# Altium PCB STM 32 F4 sensor_motor.PcbDoc
Units mm, origin at the board's own origin, x right, y up, seen from the top; angles counter-clockwise.
Board outline 287.78 x 230 mm, 2 copper layers (Top Layer, Bottom Layer); 23 components, 98 nets, 264 pads, 0 vias.
Unrouted connection lines stored in the file: 120.
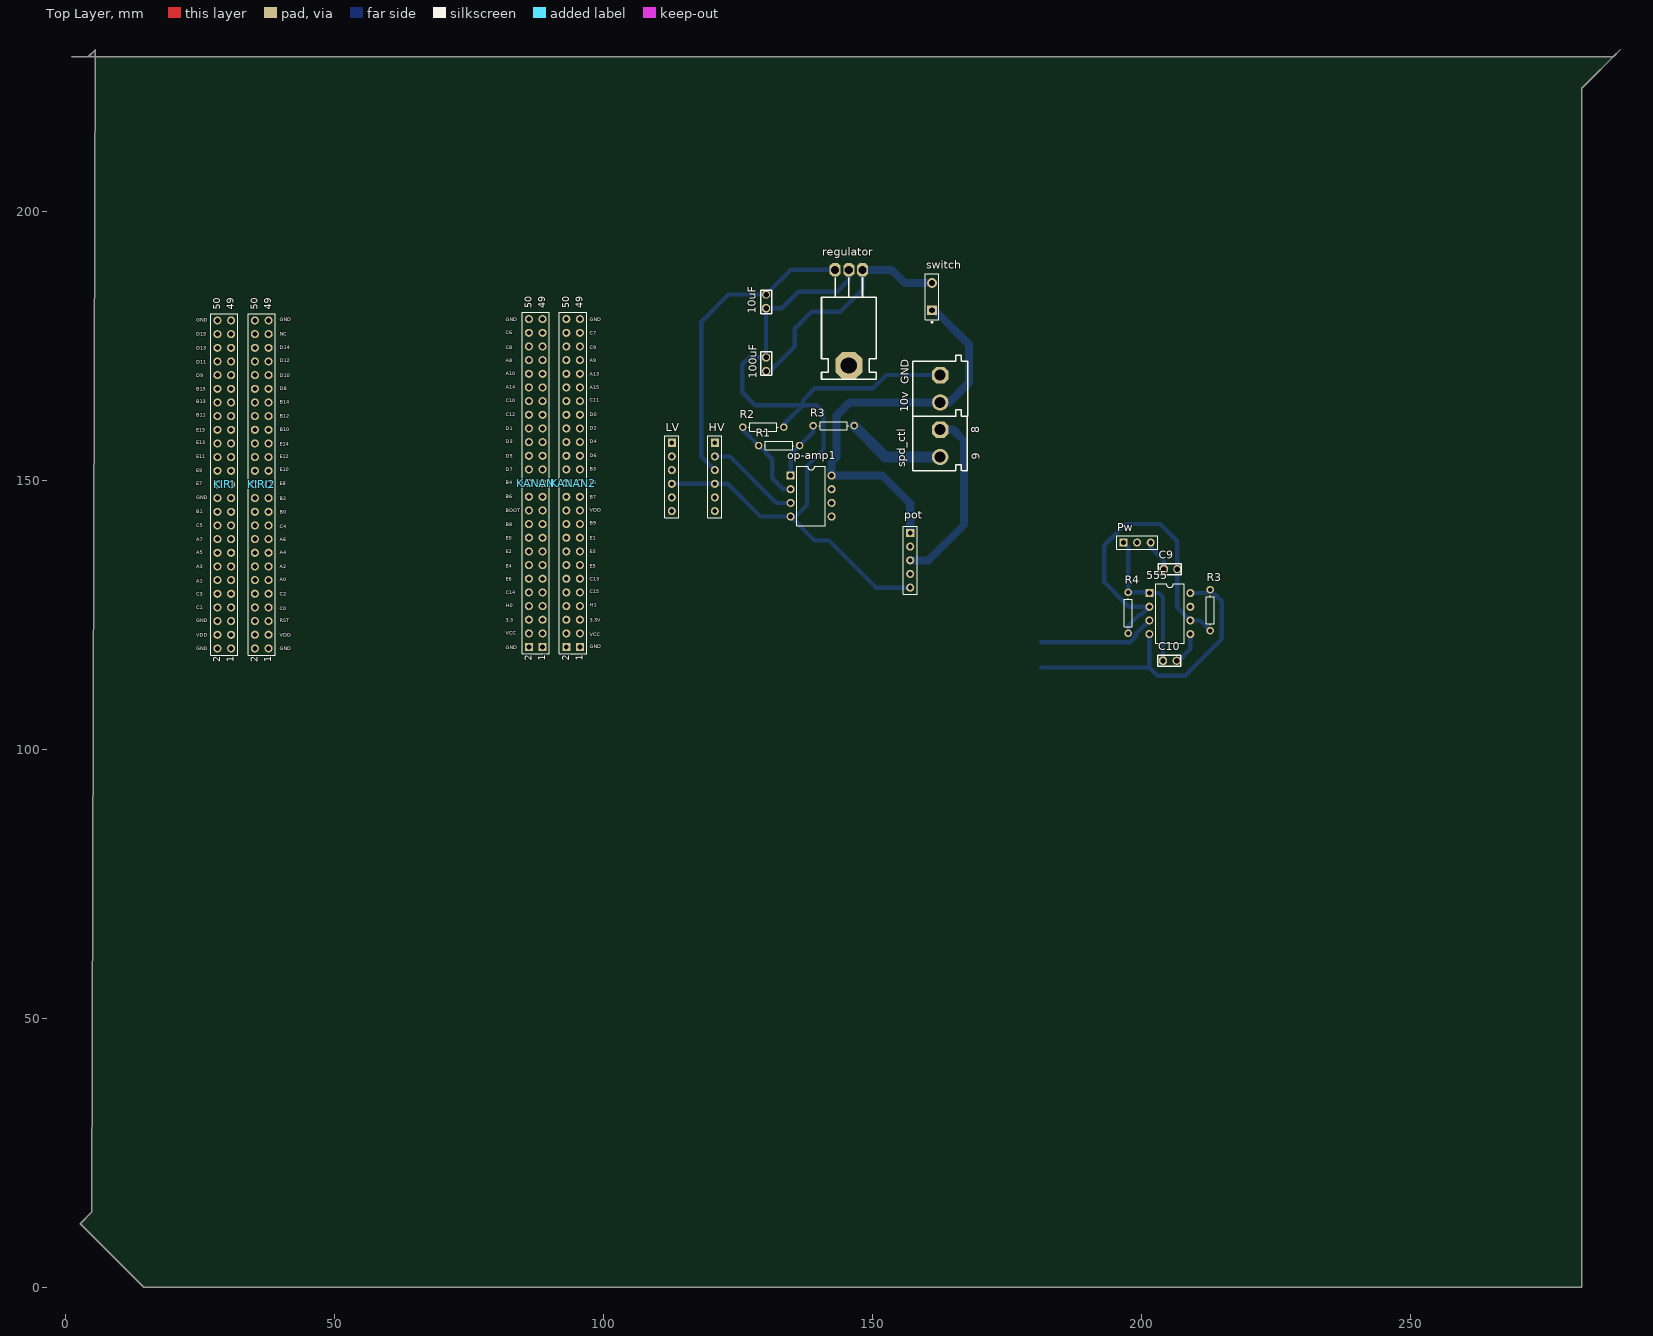
[diagram p0: Top Layer view]
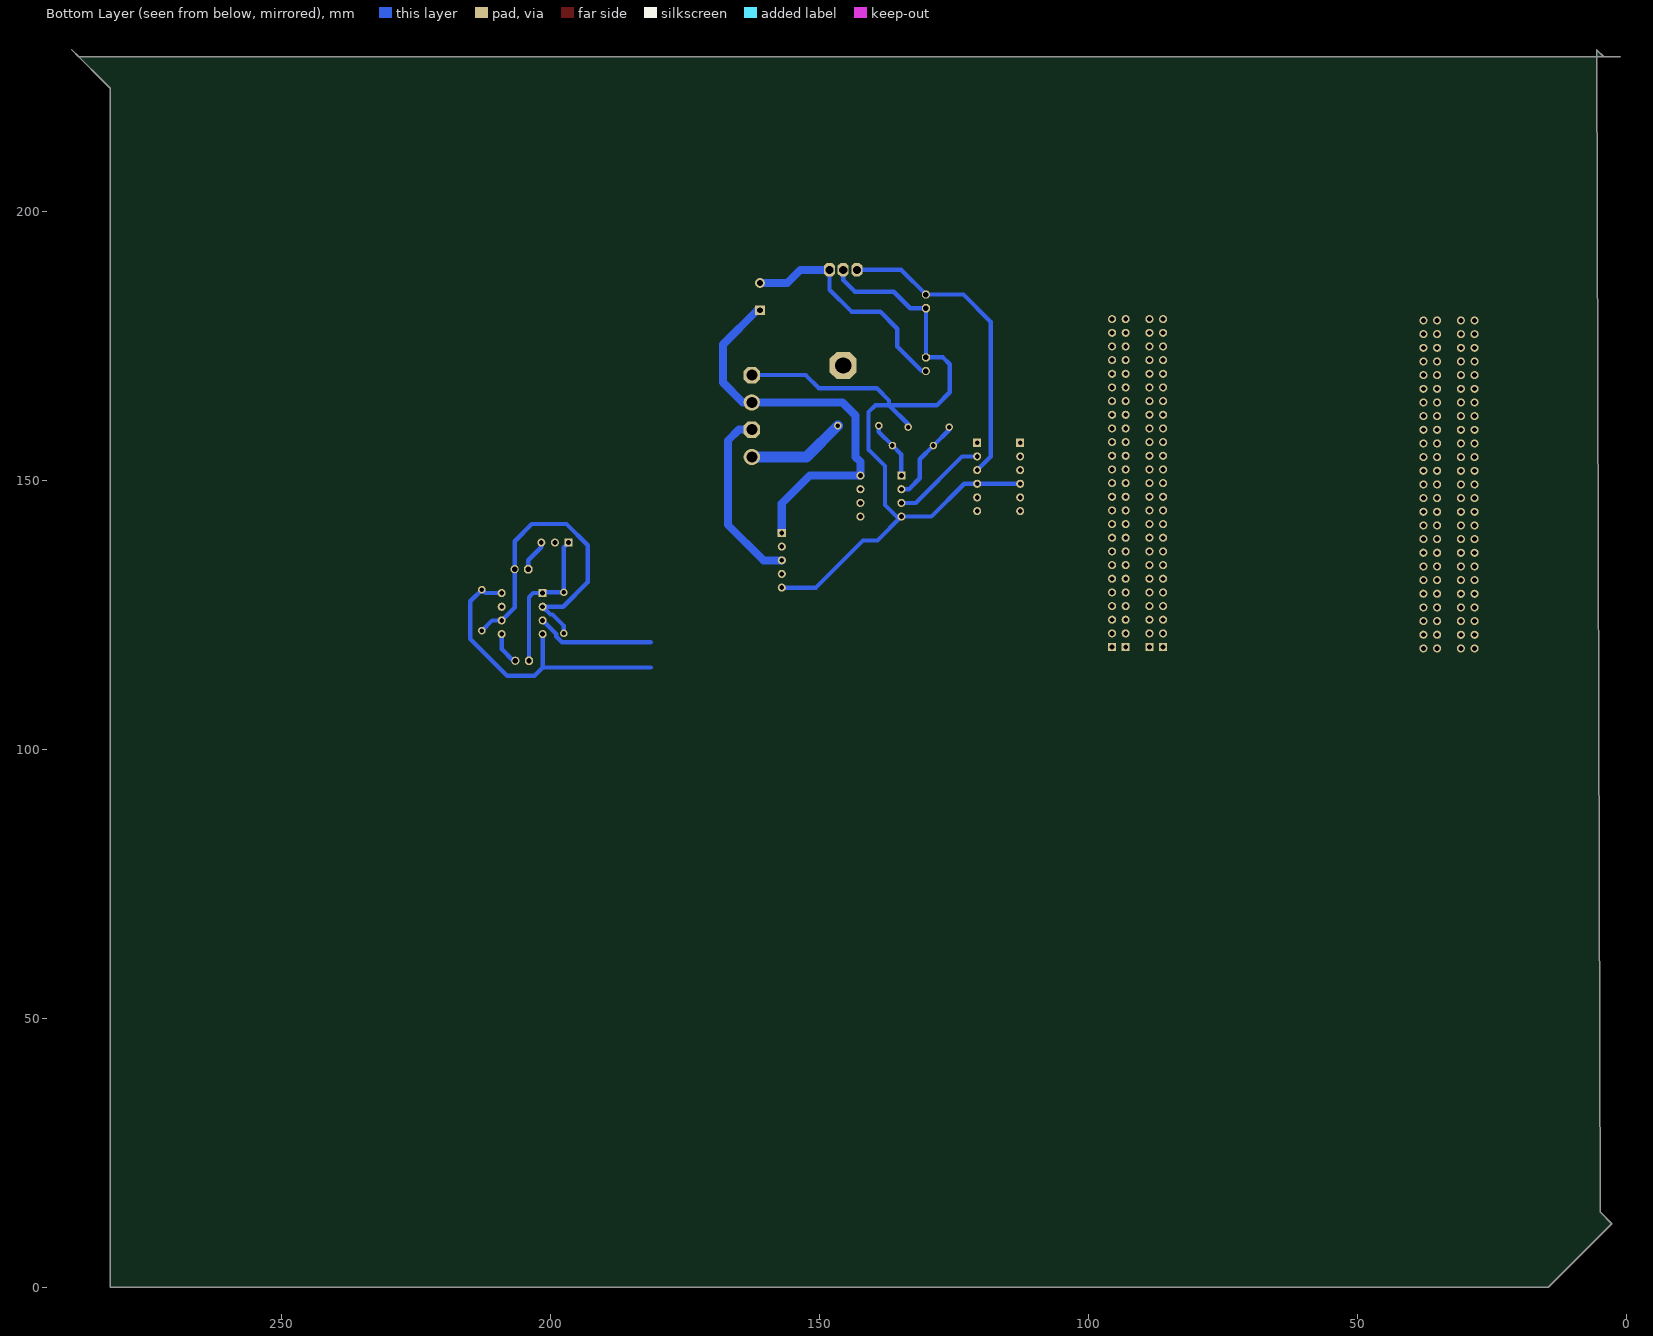
[diagram p1: Bottom Layer view, seen from below]

## Layer stack, top to bottom
Top Solder: solder mask 0.0102, Solder Resist, Dk 3.5
Top Layer: signal copper 0.0356
Dielectric1: dielectric 0.32, FR-4, Dk 4.8
Bottom Layer: signal copper 0.0356
Bottom Solder: solder mask 0.0102, Solder Resist, Dk 3.5

## Board outline
5.461,229.997 4.191,228.727 1.143,228.727 287.655,228.727 288.925,229.997 281.813,222.885 281.813,0 14.478,0 2.667,11.811 4.826,13.97 4.826,14.351

## Design rules (kind name [scope] priority, off if disabled: settings)
Clearance [All] p1: gap=0.3
PolygonConnect [All] p1: connectstyle=Relief reliefconductorwidth=0.254 reliefentries=4 polygonreliefangle="90 Angle" airgapwidth=0.254
RoutingVias [All] p1: holewidth=0.711 width=1.27 viastyle="Through Hole" minholewidth=0.711 minwidth=1.27 maxholewidth=0.711 maxwidth=1.27
SilkToSolderMaskClearance SilkscreenOverComponentPads [IsPad] p1: minsilkscreentomaskgap=0.254 clearancetoexposedcopper=TRUE
SolderMaskExpansion [All] p1: expansion=0.102
Width [All] p1: maxlimit=2 minlimit=0.8 preferedwidth=1 minimp=50.000000 maximp=50.000000 favimp=50.000000
28 further rules are at their usual default settings.

## Components (designator, comment, footprint, x,y, rotation, side; value= is the part's Value field where it differs from the comment)
10uF "Cap" My_cap100n 130.175,183.261 r90 top
10v "CON2 pin blue" My_CN2 167.64,172.085 r270 top
100uF "Cap" My_cap100n 130.175,171.577 r270 top
555 "NE555P" P008 205.232,125.222 r270 top
C9 "Cap" My_cap100n 205.359,133.477 r0 top
C10 "Cap" My_cap100n 205.232,116.459 r0 top
HV "Header 6" HDR1X6 120.65,156.972 r270 top
KANAN "KANAN" HDR2X25#1 88.629,118.999 r90 top
KANAN2 "KANAN 2" HDR2X25#1 95.584,118.999 r90 top
KIRI "KIRI" HDR2X25#2 30.734,118.745 r90 top locked
KIRI2 "KIRI 2" HDR2X25#2 37.689,118.75 r90 top
LV "Header 6" HDR1X6 112.649,156.972 r270 top
op-amp1 "LM358P" P008 138.557,147.066 r270 top
pot "Header 5" HDR1X5 156.972,140.208 r270 top
Pw "Header 3" HDR1X3 196.596,138.43 r0 top
R1 "Res1" AXIAL-0.3 132.588,156.464 r0 top
R2 "Res1" AXIAL-0.3 129.667,159.893 r180 top
R3 "Res1" AXIAL-0.3 142.748,160.147 r0 top
R3 "Res1" AXIAL-0.3 212.725,125.857 r90 top
R4 "Res1" AXIAL-0.3 197.485,125.349 r270 top
regulator "7805" My_TO-220 148.082,189.103 r180 top
spd_ctl "CON2 pin blue" My_CN2 167.627,161.938 r270 top
switch "SW-SPST" SPST-2 161.036,184.15 r90 top

## Footprints (in the part's own frame and the unit in brackets; to place one, negate y for a bottom-side part, rotate by r counter-clockwise, add the part's x,y. Pads: shape width x height; smd on the part's side, far side on the other; paste and mask are expansions set on the pad)
AXIAL-0.3 [mm] "Axial Device, Thru-Hole; 2 Leads; 0.3 in Pin Spacing"
  round 1.4 hole 0.85: 1(-3.81,0) 2(3.81,0)
  silkscreen extent -2.77,-0.76 2.77,0.76
HDR1X3 [mm] "Connector; Header; 3 Position"
  rect 1.5x1.5 hole 0.9: 1(0,0)
  round 1.5 hole 0.9: 2(2.54,0) 3(5.08,0)
  silkscreen extent -1.27,-1.27 6.35,1.27
HDR1X5 [mm] "Connector; Header; 5 Position"
  rect 1.5x1.5 hole 0.9: 1(0,0)
  round 1.5 hole 0.9: 2(2.54,0) 3(5.08,0) 4(7.62,0) 5(10.16,0)
  silkscreen extent -1.27,-1.27 11.43,1.27
HDR1X6 [mm] "Connector; Header; 6 Position"
  rect 1.5x1.5 hole 0.9: 1(0,0)
  round 1.5 hole 0.9: 2(2.54,0) 3(5.08,0) 4(7.62,0) 5(10.16,0) 6(12.7,0)
  silkscreen extent -1.27,-1.27 13.97,1.27
HDR2X25#1 [mm] "Connector; Header; 25x2 Position"
  rect 1.5x1.5 hole 0.9: 1(0,0) 2(0,2.54)
  round 1.5 hole 0.9: 3(2.54,0) 4(2.54,2.54) 5(5.08,0) 6(5.08,2.54) 7(7.62,0) 8(7.62,2.54) 9(10.16,0) 10(10.16,2.54) 11(12.7,0) 12(12.7,2.54) 13(15.24,0) 14(15.24,2.54) 15(17.78,0) 16(17.78,2.54) 17(20.32,0) 18(20.32,2.54) 19(22.86,0) 20(22.86,2.54) 21(25.4,0) 22(25.4,2.54) 23(27.94,0) 24(27.94,2.54) 25(30.48,0) 26(30.48,2.54) 27(33.02,0) 28(33.02,2.54) 29(35.56,0) 30(35.56,2.54) 31(38.1,0) 32(38.1,2.54) 33(40.64,0) 34(40.64,2.54) 35(43.18,0) 36(43.18,2.54) 37(45.72,0) 38(45.72,2.54) 39(48.26,0) 40(48.26,2.54) 41(50.8,0) 42(50.8,2.54) 43(53.34,0) 44(53.34,2.54) 45(55.88,0) 46(55.88,2.54) 47(58.42,0) 48(58.42,2.54) 49(60.96,0) 50(60.96,2.54)
  silkscreen extent -1.27,-1.27 62.23,3.81
HDR2X25#2 [mm] "Connector; Header; 25x2 Position"
  round 1.5 hole 0.9: 1(0,0) 2(0,2.54) 3(2.54,0) 4(2.54,2.54) 5(5.08,0) 6(5.08,2.54) 7(7.62,0) 8(7.62,2.54) 9(10.16,0) 10(10.16,2.54) 11(12.7,0) 12(12.7,2.54) 13(15.24,0) 14(15.24,2.54) 15(17.78,0) 16(17.78,2.54) 17(20.32,0) 18(20.32,2.54) 19(22.86,0) 20(22.86,2.54) 21(25.4,0) 22(25.4,2.54) 23(27.94,0) 24(27.94,2.54) 25(30.48,0) 26(30.48,2.54) 27(33.02,0) 28(33.02,2.54) 29(35.56,0) 30(35.56,2.54) 31(38.1,0) 32(38.1,2.54) 33(40.64,0) 34(40.64,2.54) 35(43.18,0) 36(43.18,2.54) 37(45.72,0) 38(45.72,2.54) 39(48.26,0) 40(48.26,2.54) 41(50.8,0) 42(50.8,2.54) 43(53.34,0) 44(53.34,2.54) 45(55.88,0) 46(55.88,2.54) 47(58.42,0) 48(58.42,2.54) 49(60.96,0) 50(60.96,2.54)
  silkscreen extent -1.27,-1.27 62.23,3.81
My_cap100n [mil]
  oct 60x60 hole 40: 1(-50,0)
  round 60 hole 40: 2(50,0)
  silkscreen extent -90,-40 80,40
My_CN2 [mil]
  oct 120x120 hole 80: 1(99.5,-200.5)
  round 120 hole 80: 2(299.5,-200.5)
  silkscreen extent -45,-400 400,0
My_TO-220 [mil]
  oct 196.85x196.85 hole 118.11: 0(99.49,699.49)
  oct 80x100 hole 60: 1(-0.5,-0.5) 2(99.5,-0.5) 3(199.5,-0.5)
  silkscreen extent -101,60 300,800
P008 [mm] "DIP; 8 Leads; Row Spacing 7.62 mm; Pitch 2.54 mm"
  rect 1.5x1.5 hole 0.9: 1(-3.81,-3.81)
  round 1.5 hole 0.9: 2(-1.27,-3.81) 3(1.27,-3.81) 4(3.81,-3.81) 5(3.81,3.81) 6(1.27,3.81) 7(-1.27,3.81) 8(-3.81,3.81)
  silkscreen extent -5.5,-2.65 5.5,2.65
SPST-2 [mm] "Switch; 2 Leads"
  rect 1.85x1.85 hole 1.1: 1(-2.54,0)
  round 1.85 hole 1.1: 2(2.54,0)
  silkscreen extent -4.89,-1.27 4.28,1.27

## Part data
10uF 100uF C9 C10: library part "Cap ceramic", "CAP-100Nf"
10v spd_ctl: "Connector blue screw"
555: "Precision Timer"
HV LV: "Header, 6-Pin"
KANAN KANAN2 KIRI KIRI2: library part "Header 25X2", "Header, 25-Pin, Dual row"
op-amp1: "Dual Operational Amplifier"
pot: "Header, 5-Pin"
Pw: "Header, 3-Pin"
R1 R2 R3 R3 R4: "Resistor"
regulator: "Regulator"
switch: "Single-Pole, Single-Throw Switch"

## Nets (pads, with @x,y where several pads share a name; then routed paths per layer and width w, separated by ;. In a path a pad name is that pad's centre, name@x,y a point inside that pad or via, vN(x,y) a via of type N, cw(c..) or ccw(c..) an arc to the next point about the centre after c; other vN are vias at no path point)
GND: 10uF.1 10v.1 100uF.1 555.1 C10.1 HV.4 KANAN2.1 KANAN2.2 KANAN2.49 KANAN2.50 KANAN.1 KANAN.2 KANAN.49 KANAN.50 KIRI2.1 KIRI2.2 KIRI2.6 KIRI2.24 KIRI2.49 KIRI2.50 KIRI.1 KIRI.2 KIRI.6 KIRI.24 KIRI.49 KIRI.50 LV.4 op-amp1.4 pot.5 Pw.1 R2.1 R4.1 regulator.2 | length 192.4
  Bottom Layer w0.8: LV.4 HV.4 123.063,149.352 129.159,143.256 op-amp1.4 ; R2.1 133.477,160.401 137.033,163.957 ; regulator.2 145.555,187.211 143.383,185.039 136.144,185.039 133.096,181.991 10uF.1 100uF.1 127,172.847 125.73,171.577 125.73,166.37 128.143,163.957 137.033,163.957 ; pot.5 150.622,130.048 141.859,138.811 139.192,138.811 op-amp1.4 ; 10v.1 152.54,169.558 150.114,167.132 139.319,167.132 137.033,164.846 137.033,163.957 ; Pw.1 197.485,137.541 R4.1 201.295,129.159 555.1 203.2,129.032 203.962,128.27 C10.1 ; op-amp1.4 135.636,143.256 137.795,145.415 137.795,152.654 140.843,155.702 140.843,162.687 139.573,163.957 137.033,163.957
Net10uF_2: 10uF.2 HV.3 Pw.2 regulator.3 | length 57.5
  Bottom Layer w0.8: HV.3 118.11,154.432 118.11,179.451 123.19,184.531 10uF.2 134.76,189.116 regulator.3
Net10v_2: 10v.2 op-amp1.8 pot.1 switch.1 | length 77.5
  Bottom Layer w1.5: pot.1 156.972,145.669 151.765,150.876 op-amp1.8 142.367,153.448 143.256,154.337 143.256,162.052 145.682,164.478 10v.2 164.224,164.478 167.894,168.148 167.894,175.26 161.544,181.61 switch.1
Net100uF_2: 100uF.2 regulator.1 switch.2 | length 43.7
  Bottom Layer w0.8: 100uF.2 130.937,170.307 135.509,174.879 135.509,178.181 138.684,181.356 144.018,181.356 148.095,185.433 regulator.1
  Bottom Layer w1.5: regulator.1 153.53,189.116 155.956,186.69 switch.2
Net555_2: 555.2 555.6 C9.2 R3.1@212.725,122.047 R4.2 | length 60.7
  Bottom Layer w0.8: R4.2 197.485,122.936 199.591,125.042 199.972,125.042 555.2 197.612,126.492 193.04,131.064 193.04,137.922 196.977,141.859 203.454,141.859 206.629,138.684 C9.2 206.629,126.365 555.6 210.82,123.952 R3.1@212.725,122.047
Net555_3: 555.3 KIRI2.8 KIRI.8 | length 22
  Bottom Layer w0.8: 181.356,119.888 197.814,119.888 198.885,120.959 198.885,121.415 555.3
Net555_5: 555.5 C10.2 | length 6.2
  Bottom Layer w0.8: C10.2 206.883,116.459 209.042,118.618 555.5
NetC9_1: C9.1 Pw.3 | length 6
  Bottom Layer w0.8: Pw.3 201.676,137.541 204.089,135.128 C9.1
NetHV_2: HV.2 op-amp1.3 | length 17.7
  Bottom Layer w0.8: HV.2 123.444,154.432 132.08,145.796 op-amp1.3
NetKANAN2_5: KANAN2.5 KANAN2.6 KANAN.5 KANAN.6 LV.3
NetKANAN2_7: KANAN2.7 KANAN.7
NetKANAN2_8: KANAN2.8 KANAN.8
NetKANAN2_9: KANAN2.9 KANAN.9
NetKANAN2_10: KANAN2.10 KANAN.10
NetKANAN2_11: KANAN2.11 KANAN.11
NetKANAN2_12: KANAN2.12 KANAN.12
NetKANAN2_13: KANAN2.13 KANAN.13
NetKANAN2_14: KANAN2.14 KANAN.14
NetKANAN2_15: KANAN2.15 KANAN.15
NetKANAN2_16: KANAN2.16 KANAN.16
NetKANAN2_17: KANAN2.17 KANAN.17
NetKANAN2_18: KANAN2.18 KANAN.18
NetKANAN2_19: KANAN2.19 KANAN.19
NetKANAN2_20: KANAN2.20 KANAN.20
NetKANAN2_21: KANAN2.21 KANAN.21 KIRI2.3 KIRI2.4 KIRI.3 KIRI.4
NetKANAN2_22: KANAN2.22 KANAN.22
NetKANAN2_23: KANAN2.23 KANAN.23
NetKANAN2_24: KANAN2.24 KANAN.24
NetKANAN2_25: KANAN2.25 KANAN.25
NetKANAN2_26: KANAN2.26 KANAN.26
NetKANAN2_27: KANAN2.27 KANAN.27
NetKANAN2_28: KANAN2.28 KANAN.28
NetKANAN2_29: KANAN2.29 KANAN.29
NetKANAN2_30: KANAN2.30 KANAN.30
NetKANAN2_31: KANAN2.31 KANAN.31
NetKANAN2_32: KANAN2.32 KANAN.32
NetKANAN2_33: KANAN2.33 KANAN.33
NetKANAN2_34: KANAN2.34 KANAN.34
NetKANAN2_35: KANAN2.35 KANAN.35
NetKANAN2_36: KANAN2.36 KANAN.36
NetKANAN2_37: KANAN2.37 KANAN.37
NetKANAN2_38: KANAN2.38 KANAN.38
NetKANAN2_39: KANAN2.39 KANAN.39
NetKANAN2_40: KANAN2.40 KANAN.40
NetKANAN2_41: KANAN2.41 KANAN.41
NetKANAN2_42: KANAN2.42 KANAN.42
NetKANAN2_43: KANAN2.43 KANAN.43
NetKANAN2_44: KANAN2.44 KANAN.44
NetKANAN2_45: KANAN2.45 KANAN.45
NetKANAN2_46: KANAN2.46 KANAN.46
NetKANAN2_47: KANAN2.47 KANAN.47
NetKANAN2_48: KANAN2.48 KANAN.48
NetKIRI2_5: KIRI2.5 KIRI.5
NetKIRI2_7: KIRI2.7 KIRI.7
NetKIRI2_9: KIRI2.9 KIRI.9
NetKIRI2_10: KIRI2.10 KIRI.10
NetKIRI2_11: KIRI2.11 KIRI.11
NetKIRI2_12: KIRI2.12 KIRI.12
NetKIRI2_13: KIRI2.13 KIRI.13
NetKIRI2_14: KIRI2.14 KIRI.14
NetKIRI2_15: KIRI2.15 KIRI.15 LV.2
NetKIRI2_16: KIRI2.16 KIRI.16
NetKIRI2_17: KIRI2.17 KIRI.17
NetKIRI2_18: KIRI2.18 KIRI.18
NetKIRI2_19: KIRI2.19 KIRI.19
NetKIRI2_20: KIRI2.20 KIRI.20
NetKIRI2_21: KIRI2.21 KIRI.21
NetKIRI2_22: KIRI2.22 KIRI.22
NetKIRI2_23: KIRI2.23 KIRI.23
NetKIRI2_25: KIRI2.25 KIRI.25
NetKIRI2_26: KIRI2.26 KIRI.26
NetKIRI2_27: KIRI2.27 KIRI.27
NetKIRI2_28: KIRI2.28 KIRI.28
NetKIRI2_29: KIRI2.29 KIRI.29
NetKIRI2_30: KIRI2.30 KIRI.30
NetKIRI2_31: KIRI2.31 KIRI.31
NetKIRI2_32: KIRI2.32 KIRI.32
NetKIRI2_33: KIRI2.33 KIRI.33
NetKIRI2_34: KIRI2.34 KIRI.34
NetKIRI2_35: KIRI2.35 KIRI.35
NetKIRI2_36: KIRI2.36 KIRI.36
NetKIRI2_37: KIRI2.37 KIRI.37
NetKIRI2_38: KIRI2.38 KIRI.38
NetKIRI2_39: KIRI2.39 KIRI.39
NetKIRI2_40: KIRI2.40 KIRI.40
NetKIRI2_41: KIRI2.41 KIRI.41
NetKIRI2_42: KIRI2.42 KIRI.42
NetKIRI2_43: KIRI2.43 KIRI.43
NetKIRI2_44: KIRI2.44 KIRI.44
NetKIRI2_45: KIRI2.45 KIRI.45
NetKIRI2_46: KIRI2.46 KIRI.46
NetKIRI2_47: KIRI2.47 KIRI.47
NetKIRI2_48: KIRI2.48 KIRI.48
Netop-amp1_1: op-amp1.1 R1.2 R3.1@138.938,160.147 | length 11
  Bottom Layer w0.8: op-amp1.1 134.747,154.813 R1.2 138.938,159.004 R3.1@138.938,160.147
Netop-amp1_2: op-amp1.2 R1.1 R2.2 | length 16.1
  Bottom Layer w0.8: R2.2 125.857,159.385 R1.1 131.318,153.924 131.318,150.368 133.35,148.336 op-amp1.2
Netpot_3: pot.3 spd_ctl.1 | length 33.7
  Bottom Layer w1.5: pot.3 160.401,135.128 167.005,141.732 167.005,157.353 164.948,159.41 spd_ctl.1
NetR3_2: R3.2@146.558,160.147 spd_ctl.2 | length 18.4
  Bottom Layer w2: R3.2@146.558,160.147 152.375,154.33 spd_ctl.2
VCC: 555.4 555.8 KANAN2.3 KANAN2.4 KANAN.3 KANAN.4 R3.2@212.725,129.667 | length 57.2
  Bottom Layer w0.8: 181.356,115.189 201.422,115.189 ; 555.4 201.422,115.189 ; 555.8 212.09,129.032 212.725,129.667 214.884,127.508 214.884,120.523 208.026,113.665 202.946,113.665 201.422,115.189
pads on no net: 555.7 HV.1 HV.5 HV.6 LV.1 LV.5 LV.6 op-amp1.5 op-amp1.6 op-amp1.7 pot.2 pot.4 regulator.0
copper on no net: | length 0.4
  Bottom Layer w0.8: 209.042,126.492 209.289,126.245

## Silkscreen, mask and mechanical layers (free items; w line width, h text height)
Top Overlay:
  text "GND" at 39.751,179.578 h0.7
  text "GND" at 81.788,179.578 h0.7
  text "GND" at 97.409,179.578 h0.7
  text "GND" at 24.257,179.451 h0.7
  text "C6" at 81.788,177.165 h0.7
  text "C7" at 97.409,177.038 h0.7
  text "D15" at 24.257,176.911 h0.7
  text "NC" at 39.751,176.911 h0.7
  text "D14" at 39.751,174.371 h0.7
  text "C8" at 81.788,174.371 h0.7
  text "C9" at 97.409,174.371 h0.7
  text "D13" at 24.257,174.244 h0.7
  text "D12" at 39.751,171.958 h0.7
  text "A8" at 81.788,171.958 h0.7
  text "A9" at 97.409,171.958 h0.7
  text "D11" at 24.257,171.704 h0.7
  text "A10" at 81.788,169.545 h0.7
  text "A13" at 97.409,169.418 h0.7
  text "D9" at 24.257,169.164 h0.7
  text "D10" at 39.751,169.164 h0.7
  text "GND" at 156.718,167.894 h1.52 r90
  text "A14" at 81.788,167.005 h0.7
  text "A15" at 97.409,166.878 h0.7
  text "D8" at 39.751,166.751 h0.7
  text "B15" at 24.257,166.624 h0.7
  text "C11" at 97.409,164.592 h0.7
  text "C10" at 81.788,164.465 h0.7
  text "B13" at 24.257,164.338 h0.7
  text "B14" at 39.751,164.211 h0.7
  text "C12" at 81.788,161.925 h0.7
  text "D0" at 97.409,161.925 h0.7
  text "B11" at 24.257,161.798 h0.7
  text "B12" at 39.751,161.671 h0.7
  text "D2" at 97.409,159.385 h0.7
  text "D1" at 81.788,159.258 h0.7
  text "B10" at 39.751,159.131 h0.7
  text "E15" at 24.257,159.004 h0.7
  text "8" at 169.799,158.75 h1.52 r90
  text "D3" at 81.788,156.845 h0.7
  text "D4" at 97.409,156.845 h0.7
  text "E13" at 24.257,156.718 h0.7
  text "E14" at 39.751,156.464 h0.7
  text "D6" at 97.409,154.305 h0.7
  text "D5" at 81.788,154.178 h0.7
  text "E11" at 24.257,154.051 h0.7
  text "E12" at 39.751,154.051 h0.7
  text "9" at 169.926,153.797 h1.52 r90
  text "B3" at 97.409,151.765 h0.7
  text "E10" at 39.751,151.638 h0.7
  text "D7" at 81.788,151.638 h0.7
  text "E9" at 24.257,151.511 h0.7
  text "B4" at 81.788,149.225 h0.7
  text "B5" at 97.409,149.225 h0.7
  text "E7" at 24.257,149.098 h0.7
  text "E8" at 39.751,149.098 h0.7
  text "GND" at -29.337,148.082 h0.7
  text "B6" at 81.788,146.685 h0.7
  text "B7" at 97.409,146.558 h0.7
  text "GND" at 24.257,146.431 h0.7
  text "B2" at 39.751,146.304 h0.7
  text "GND" at -29.337,145.542 h0.7
  text "VDD" at 97.409,144.145 h0.7
  text "BOOT" at 81.788,144.018 h0.7
  text "B1" at 24.257,143.891 h0.7
  text "B0" at 39.751,143.764 h0.7
  text "GND" at -29.337,142.875 h0.7
  text "B9" at 97.409,141.732 h0.7
  text "B8" at 81.788,141.478 h0.7
  text "C5" at 24.257,141.224 h0.7
  text "C4" at 39.751,141.097 h0.7
  text "GND" at -29.464,140.335 h0.7
  text "E0" at 81.788,138.938 h0.7
  text "E1" at 97.409,138.938 h0.7
  text "A7" at 24.257,138.684 h0.7
  text "A6" at 39.751,138.684 h0.7
  text "GND" at -29.464,137.795 h0.7
  text "E2" at 81.788,136.398 h0.7
  text "E3" at 97.409,136.398 h0.7
  text "A5" at 24.257,136.271 h0.7
  text "A4" at 39.751,136.271 h0.7
  text "GND" at -29.718,135.255 h0.7
  text "E4" at 81.788,133.731 h0.7
  text "E5" at 97.409,133.731 h0.7
  text "A3" at 24.257,133.604 h0.7
  text "A2" at 39.751,133.604 h0.7
  text "GND" at -29.718,132.969 h0.7
  text "E6" at 81.788,131.318 h0.7
  text "C13" at 97.409,131.318 h0.7
  text "A0" at 39.751,131.191 h0.7
  text "A1" at 24.257,130.937 h0.7
  text "GND" at -29.718,130.429 h0.7
  text "C15" at 97.409,129.032 h0.7
  text "C14" at 81.788,128.778 h0.7
  text "C3" at 24.257,128.524 h0.7
  text "C2" at 39.751,128.524 h0.7
  text "GND" at -29.591,127.635 h0.7
  text "H1" at 97.409,126.492 h0.7
  text "H0" at 81.788,126.365 h0.7
  text "C1" at 24.257,125.984 h0.7
  text "C0" at 39.751,125.857 h0.7
  text "GND" at -29.718,125.349 h0.7
  text "3.3" at 81.788,123.698 h0.7
  text "3.3V" at 97.409,123.698 h0.7
  text "GND" at 24.257,123.571 h0.7
  text "RST" at 39.751,123.571 h0.7
  text "GND" at -29.718,122.682 h0.7
  text "VCC" at 81.788,121.285 h0.7
  text "VCC" at 97.409,121.031 h0.7
  text "VDD" at 24.257,120.904 h0.7
  text "VDD" at 39.751,120.904 h0.7
  text "GND" at -29.718,120.142 h0.7
  text "GND" at 97.409,118.745 h0.7
  text "GND" at 81.788,118.618 h0.7
  text "GND" at 24.257,118.364 h0.7
  text "GND" at 39.751,118.364 h0.7
  text "GND" at -29.718,117.729 h0.7
  text "GND" at -29.718,115.062 h0.7
  text "GND" at -29.718,112.522 h0.7
  text "GND" at -29.464,110.109 h0.7
  text "GND" at -29.464,107.061 h0.7
  text "GND" at -29.464,104.902 h0.7
  text "GND" at -29.464,102.362 h0.7
  text "GND" at -29.337,99.568 h0.7
  text "GND" at -29.337,96.647 h0.7
  text "GND" at -29.337,94.234 h0.7
  text "GND" at -29.464,92.075 h0.7
  text "GND" at -29.337,89.662 h0.7
  text "GND" at -29.337,86.868 h0.7

## Text inside footprints (layer, text, board x,y; h text height)
KANAN: Top Overlay "2" at 86.597,116.459 h1.27 r90; Top Overlay "1" at 89.137,116.459 h1.27 r90; Top Overlay "49" at 89.137,181.991 h1.27 r90; Top Overlay "50" at 86.597,181.991 h1.27 r90
KANAN2: Top Overlay "2" at 93.552,116.459 h1.27 r90; Top Overlay "1" at 96.092,116.459 h1.27 r90; Top Overlay "49" at 96.092,181.991 h1.27 r90; Top Overlay "50" at 93.552,181.991 h1.27 r90
KIRI: Top Overlay "2" at 28.702,116.205 h1.27 r90; Top Overlay "1" at 31.242,116.205 h1.27 r90; Top Overlay "49" at 31.242,181.737 h1.27 r90; Top Overlay "50" at 28.702,181.737 h1.27 r90
KIRI2: Top Overlay "2" at 35.657,116.21 h1.27 r90; Top Overlay "1" at 38.197,116.21 h1.27 r90; Top Overlay "49" at 38.197,181.742 h1.27 r90; Top Overlay "50" at 35.657,181.742 h1.27 r90